# Altium PCB final pedal.PcbDoc
Units mm, origin at the board's own origin, x right, y up, seen from the top; angles counter-clockwise.
Board outline 76.9 x 78.8 mm, 2 copper layers (Top Layer, Bottom Layer); 52 components, 46 nets, 163 pads, 0 vias.
Unrouted connection lines stored in the file: 2.
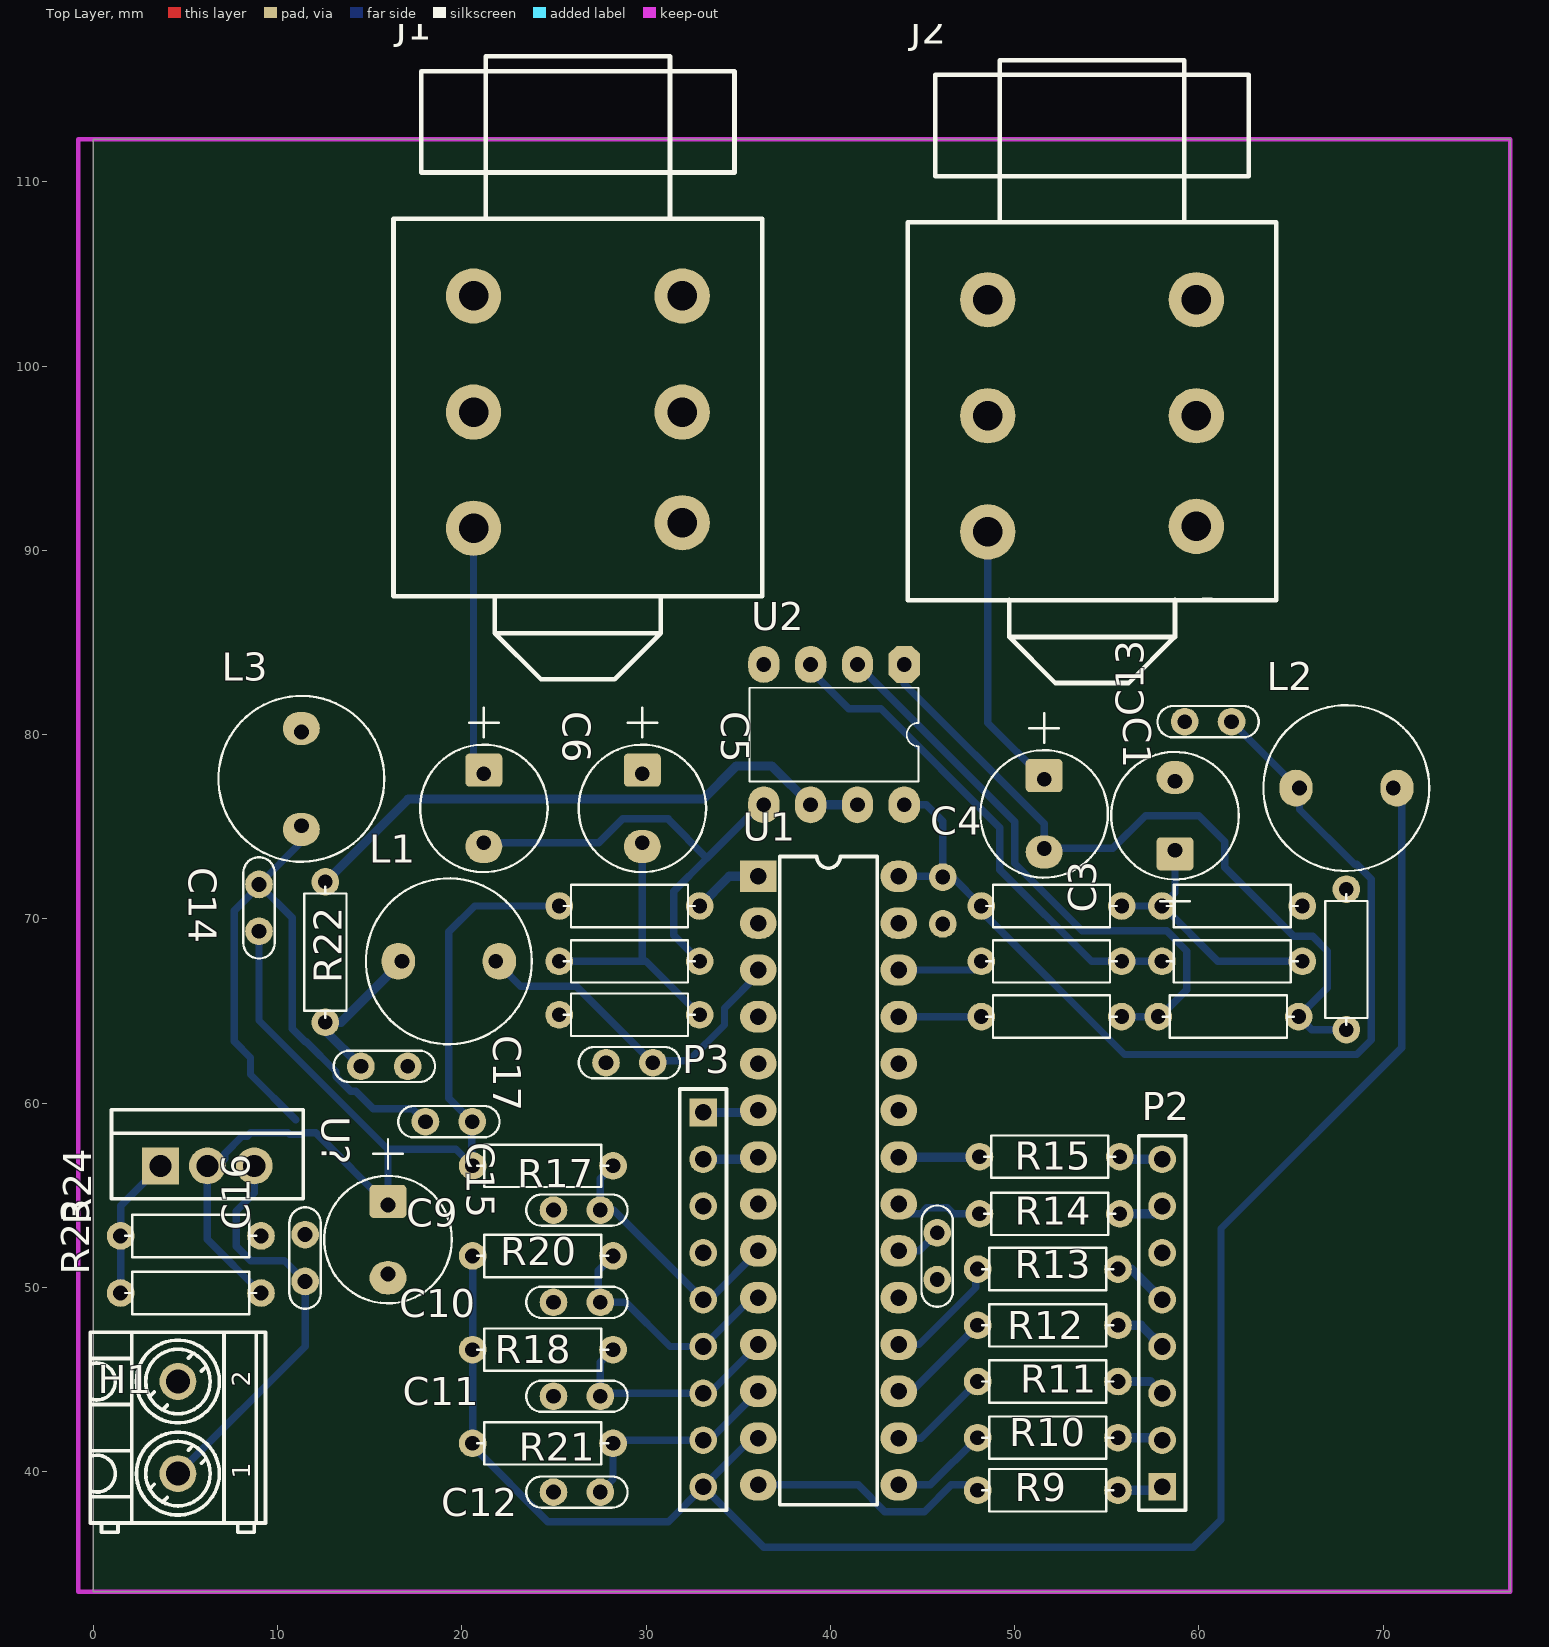
[diagram p0: Top Layer view]
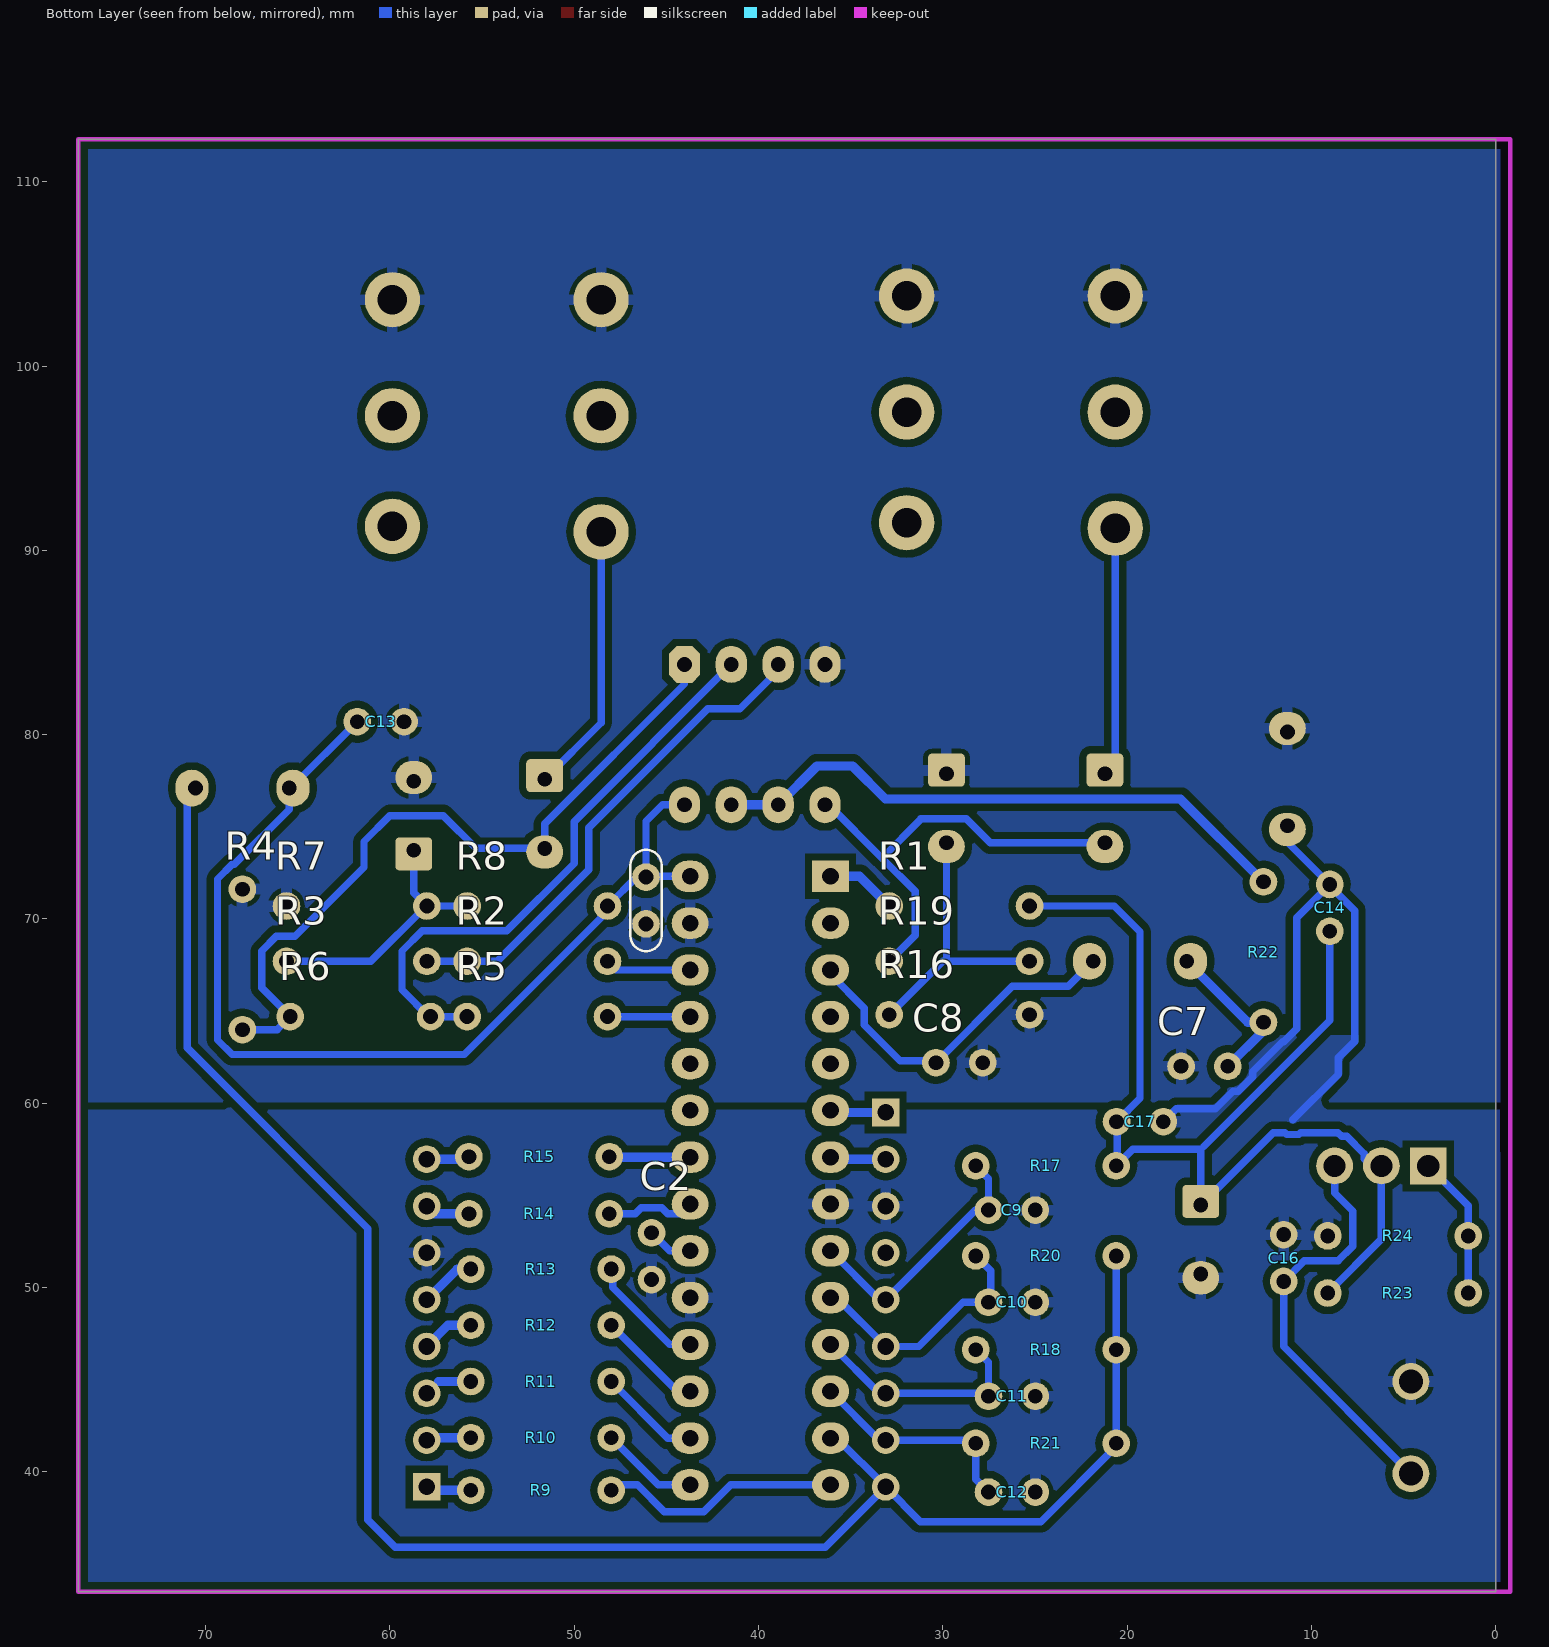
[diagram p1: Bottom Layer view, seen from below]
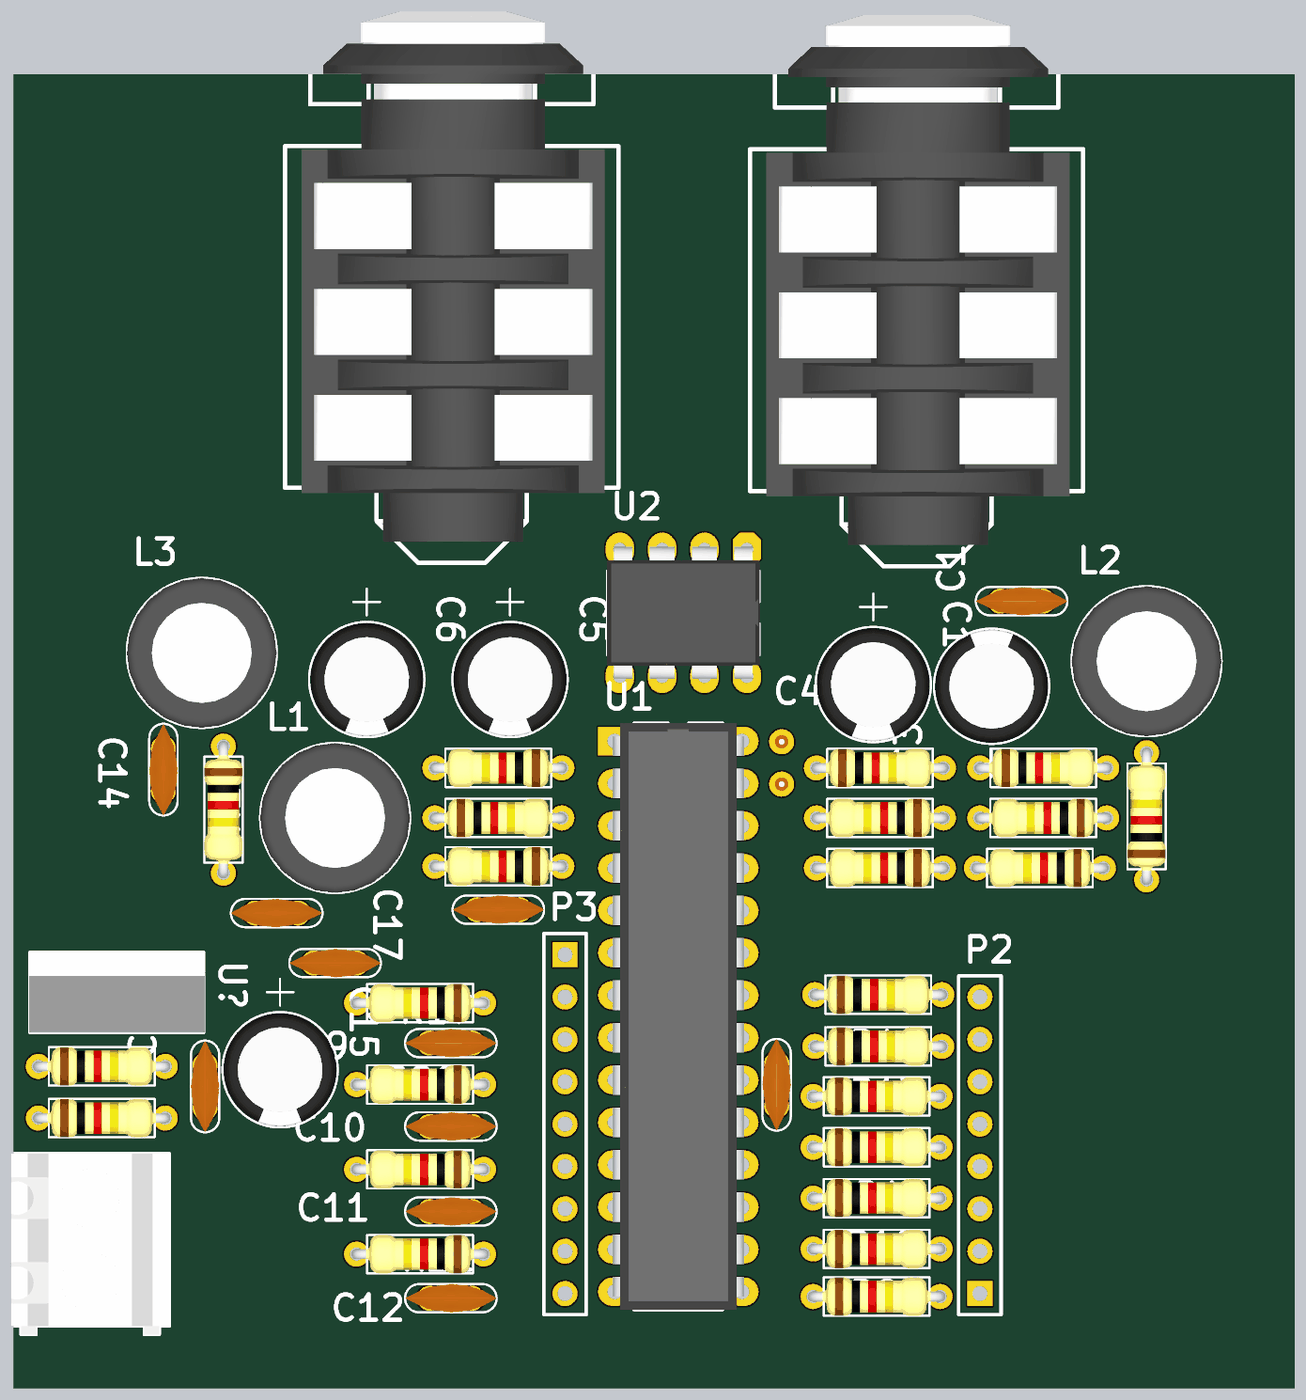
[diagram p2: 3D render of the assembled board from above, using the file's embedded part models]
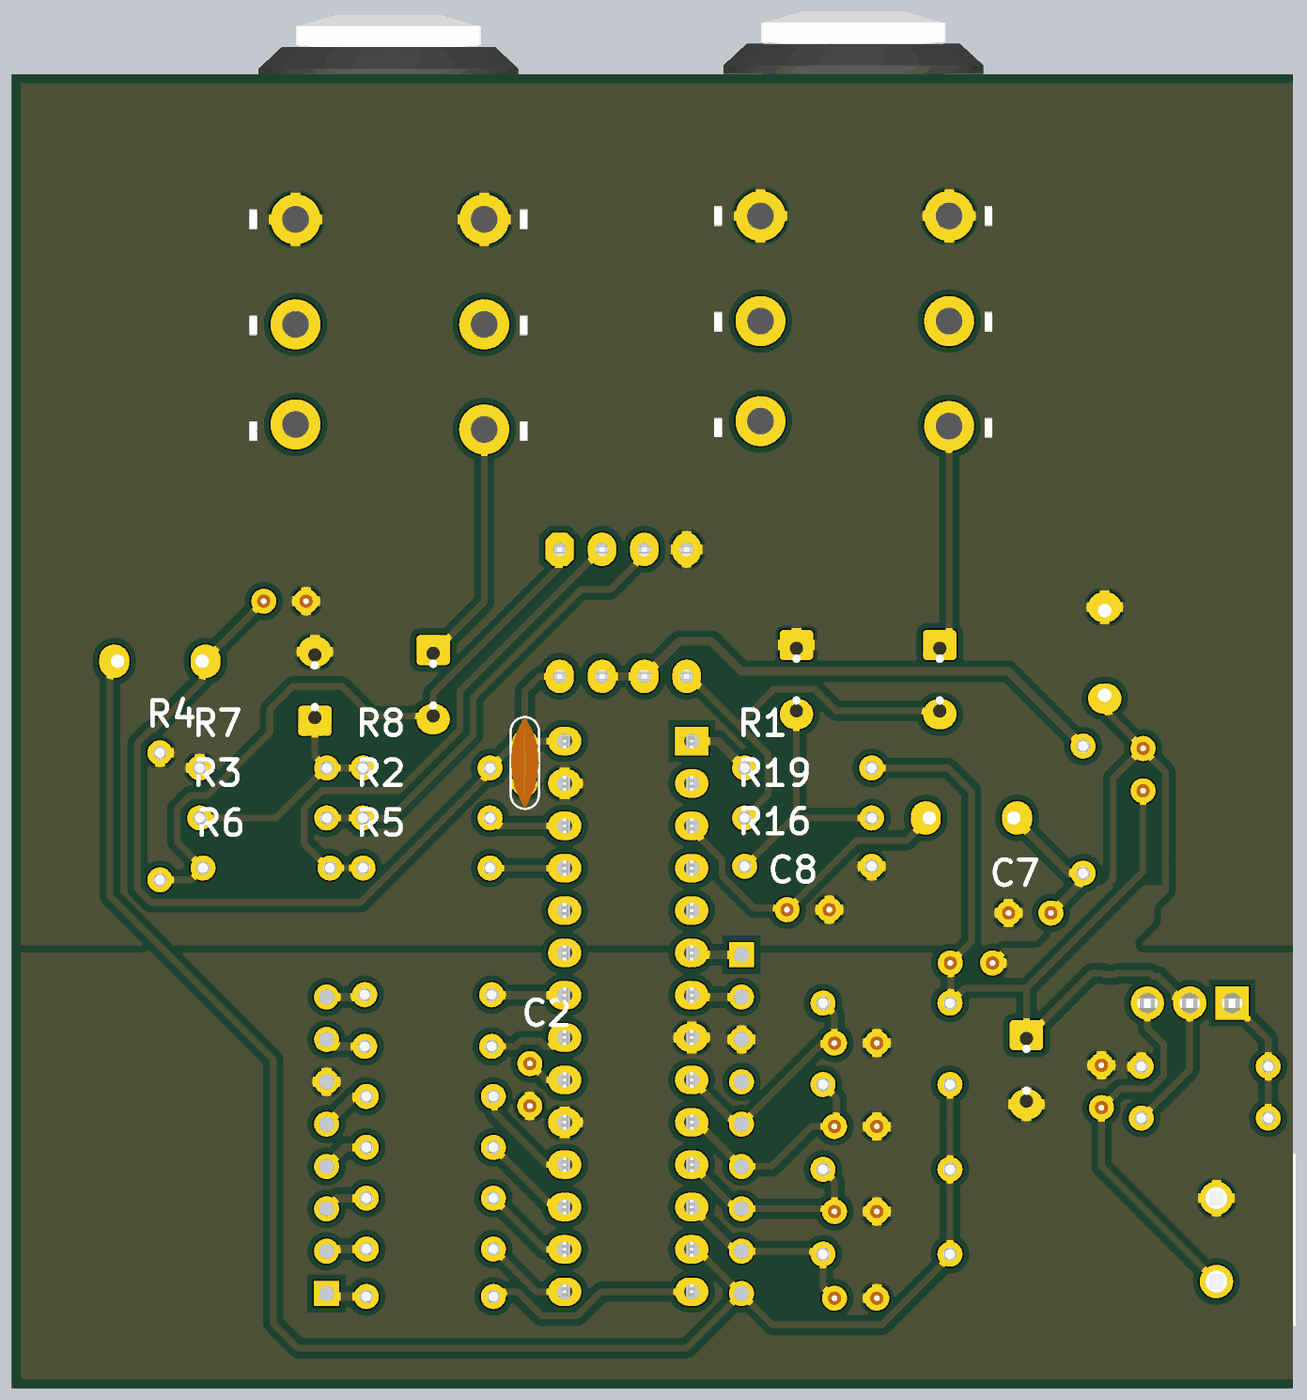
[diagram p3: 3D render of the assembled board from below, using the file's embedded part models]

## Layer stack, top to bottom
Top Solder: solder mask 0.0102, Solder Resist, Dk 3.5
Top Layer: signal copper 0.0356
Dielectric 1: dielectric 0.32, FR-4, Dk 4.8
Bottom Layer: signal copper 0.0356
Bottom Solder: solder mask 0.0102, Solder Resist, Dk 3.5

## Board outline
0,33.5 0,112.3 76.9,112.3 76.9,33.5

## Design rules (kind name [scope] priority, off if disabled: settings)
Clearance [All] p1: gap=0.4
PlaneClearance [All] p1: clearance=0.3
PlaneConnect [All] p1: planeconnectstyle=Direct reliefexpansion=0.508 reliefentries=4 reliefconductorwidth=0.254 reliefairgap=0.254
PolygonConnect [All] p1: connectstyle=Relief reliefconductorwidth=0.6 reliefentries=4 polygonreliefangle="90 Angle" airgapwidth=0.254
RoutingVias [All] p1: holewidth=0.711 width=1.27 viastyle="Through Hole" minholewidth=0.711 minwidth=1.27 maxholewidth=0.711 maxwidth=1.27
SolderMaskExpansion [All] p1: expansion=0.102
Width [All] p1: maxlimit=1 minlimit=0.4 preferedwidth=0.4
28 further rules are at their usual default settings.

## Components (designator, comment, footprint, x,y, rotation, side; value= is the part's Value field where it differs from the comment)
C1 "10µ" CAPAE250P680X1220_VERT 51.6,75.7 r270 top
C2 "100n" Cap-Disk-D5.5-R2.54 45.8,51.7 r270 bottom
C3 "10µ" CAPAE250P680X1220_VERT 58.7,75.6 r90 top
C4 "100n" Cap-Disk-D5.5-R2.54 46.1,71 r270 top
C5 "10µ" CAPAE250P680X1220_VERT 29.8,76 r270 top
C6 "10µ" CAPAE250P680X1220_VERT 21.2,76 r270 top
C7 "100n" Cap-Disk-D5.5-R2.54 15.8,62 r0 bottom
C8 "100n" Cap-Disk-D5.5-R2.54 29.1,62.2 r180 bottom
C9 "100n" Cap-Disk-D5.5-R2.54 26.248,54.2 r180 bottom
C10 "100n" Cap-Disk-D5.5-R2.54 26.248,49.2 r180 bottom
C11 "100n" Cap-Disk-D5.5-R2.54 26.248,44.1 r180 bottom
C12 "100n" Cap-Disk-D5.5-R2.54 26.248,38.9 r180 bottom
C13 "100n" Cap-Disk-D5.5-R2.54 60.5,80.7 r180 bottom
C14 "100n" Cap-Disk-D5.5-R2.54 9,70.6 r90 bottom
C15 "10µ" CAPAE250P680X1220_VERT 16,52.6 r270 top
C16 "100n" Cap-Disk-D5.5-R2.54 11.5,51.6 r90 bottom
C17 "100n" Cap-Disk-D5.5-R2.54 19.3,59 r180 bottom
H1 "BATTERY" WIELAND_25.161.0253.0 4.6,42.4 r90 top
J1 "Phone-Jack 6.3mm Stereo SW" "PHONE-JACK STEREO SW 6.3MM" 18.1,91.2 r0 top
J2 "Phone-Jack 6.3mm Stereo SW" "PHONE-JACK STEREO SW 6.3MM" 46,91 r0 top
L1 "INDC_180u_Toroid" Dr-CW8A 19.3,67.7 r0 top
L2 "INDC_180u_Toroid" Dr-CW8A 68,77.1 r0 top
L3 "INDC_180u_Toroid" Dr-CW8A 11.3,77.6 r270 top
P2 "Header 8" HDR1X8 58,39.18 r90 top
P3 "Header 9" HDR1X9 33.1,59.5 r270 top
R1 "Thick Film" R0.25-300 29.1,70.7 r0 bottom
R2 "Thick Film" R0.25-300 52,67.7 r0 bottom
R3 "Thick Film" R0.25-300 61.8,67.7 r0 bottom
R4 "Thick Film" R0.25-300 68,67.8 r270 bottom
R5 "Thick Film" R0.25-300 52,64.7 r0 bottom
R6 "Thick Film" R0.25-300 61.6,64.7 r0 bottom
R7 "Thick Film" R0.25-300 61.8,70.7 r180 bottom
R8 "Thick Film" R0.25-300 52,70.7 r180 bottom
R9 "Thick Film" R0.25-300 51.8,39 r180 bottom
R10 "Thick Film" R0.25-300 51.8,41.85 r180 bottom
R11 "Thick Film" R0.25-300 51.8,44.9 r180 bottom
R12 "Thick Film" R0.25-300 51.8,47.95 r180 bottom
R13 "Thick Film" R0.25-300 51.8,51 r180 bottom
R14 "Thick Film" R0.25-300 51.9,54 r180 bottom
R15 "Thick Film" R0.25-300 51.9,57.1 r180 bottom
R16 "Thick Film" R0.25-300 29.1,64.8 r0 bottom
R17 "Thick Film" R0.25-300 24.4,56.6 r0 bottom
R18 "Thick Film" R0.25-300 24.4,46.629 r0 bottom
R19 "Thick Film" R0.25-300 29.1,67.7 r180 bottom
R20 "Thick Film" R0.25-300 24.4,51.714 r0 bottom
R21 "Thick Film" R0.25-300 24.4,41.543 r0 bottom
R22 "Thick Film" R0.25-300 12.6,68.2 r90 bottom
R23 "Thick Film" R0.25-300 5.3,49.7 r180 bottom
R24 "Thick Film" R0.25-300 5.3,52.8 r180 bottom
U1 "DSPIC33FJ128GP802-I/SP" DIP28-300 39.9,55.8 r0 top
U2 "OPA2350" DIL8-300A 40.2,80 r180 top
U? "LM317KC" TO-220-v 6.2,56.6 r0 top

## Footprints (in the part's own frame and the unit in brackets; to place one, negate y for a bottom-side part, rotate by r counter-clockwise, add the part's x,y. Pads: shape width x height; smd on the part's side, far side on the other; paste and mask are expansions set on the pad)
Cap-Disk-D5.5-R2.54 [mm]
  round 1.5 hole 0.8: 1(1.27,0) 2(-1.27,0)
  body extent -2.75,-0.86 2.75,0.86, height 6.25
CAPAE250P680X1220_VERT [mm]
  round 0.508 on Mech15: 0(0,0)
  rrect25% 1.8x2 hole 0.8 copper offset -0.2,0: 1(-1.873,0)
  oval 1.8x2 hole 0.8 copper offset 0.2,0: 2(1.873,0)
  silkscreen extent -5.45,-3.46 3.46,3.46, body extent -3.37,-3.37 3.37,3.37, height 12.2
DIL8-300A [mm]
  oct 1.7x2 hole 0.8: 1(-3.81,-3.81)
  oval 1.7x2 hole 0.8: 2(-1.27,-3.81) 3(1.27,-3.81) 4(3.81,-3.81) 5(3.81,3.81) 6(1.27,3.81) 7(-1.27,3.81) 8(-3.81,3.81)
  silkscreen extent -4.58,-2.54 4.58,2.54, body extent -4.58,-3.96 4.58,3.96, height 3.88
DIP28-300 [mm] "DIP 28 Leads, Row Spacing 7.62mm; Pitch 2.54mm"
  rect 2x1.7 hole 0.9: 1(-3.81,16.51)
  oval 2x1.7 hole 0.9: 2(-3.81,13.97) 3(-3.81,11.43) 4(-3.81,8.89) 5(-3.81,6.35) 6(-3.81,3.81) 7(-3.81,1.27) 8(-3.81,-1.27) 9(-3.81,-3.81) 10(-3.81,-6.35) 11(-3.81,-8.89) 12(-3.81,-11.43) 13(-3.81,-13.97) 14(-3.81,-16.51) 15(3.81,-16.51) 16(3.81,-13.97) 17(3.81,-11.43) 18(3.81,-8.89) 19(3.81,-6.35) 20(3.81,-3.81) 21(3.81,-1.27) 22(3.81,1.27) 23(3.81,3.81) 24(3.81,6.35) 25(3.81,8.89) 26(3.81,11.43) 27(3.81,13.97) 28(3.81,16.51)
  silkscreen extent -2.65,-17.59 2.65,17.59, body extent -3.93,-17.59 3.94,17.59, height 4.57
Dr-CW8A [mm]
  oval 1.8x2 hole 0.8 copper offset -0.2,0: 1(-2.54,0)
  oval 1.8x2 hole 0.8 copper offset 0.2,0: 2(2.54,0)
  silkscreen extent -4.5,-4.5 4.5,4.5, body extent -4.5,-4.5 4.5,4.5, height 13.27
HDR1X8 [mm] "Connector; Header; 8 Position"
  rect 1.5x1.5 hole 0.9: 1(0,0)
  round 1.5 hole 0.9: 2(2.54,0) 3(5.08,0) 4(7.62,0) 5(10.16,0) 6(12.7,0) 7(15.24,0) 8(17.78,0)
  silkscreen extent -1.27,-1.27 19.05,1.27
HDR1X9 [mm] "Connector; Header; 9 Position"
  rect 1.5x1.5 hole 0.9: 1(0,0)
  round 1.5 hole 0.9: 2(2.54,0) 3(5.08,0) 4(7.62,0) 5(10.16,0) 6(12.7,0) 7(15.24,0) 8(17.78,0) 9(20.32,0)
  silkscreen extent -1.27,-1.27 21.59,1.27
"PHONE-JACK STEREO SW 6.3MM" [mm] "SJ-6306"
  round 3 hole 1.6: 1(2.54,0) 2(2.54,6.3) 3(2.54,12.6) 4(13.86,12.6) 5(13.86,6.3) 6(13.86,0.3)
  silkscreen extent -1.8,-8.2 18.2,25.6, body extent -0.81,-6.93 17.39,24.86, height 16
R0.25-300 [mm]
  round 1.5 hole 0.8: 1(3.81,0) 2(-3.81,0)
  body extent -4.11,-1.15 4.11,1.15, height 2.3
TO-220-v [mm] "TO-220 3-Terminal - Vertical Mount"
  rect 2x2 hole 1.2: 1(-2.54,0)
  round 2 hole 1.2: 2(0,0) 3(2.54,0)
  silkscreen extent -5.21,-1.78 5.21,3.05, body extent -5.27,-1.75 5.27,2.95, height 20.5
WIELAND_25.161.0253.0 [mm] "Terminal Block, Pitch 5mm, 2 Positions, Screw Connection"
  round 2 hole 1.3: 1(-2.5,0) 2(2.5,0)
  silkscreen extent -5.68,-4.75 5.18,4.75, body extent -5.67,-4.75 5.18,4.75, height 15

## Part data
C1 C3 C5 C6 C15: library part CAPT_330u_2917_6V3, "Capacitor SMD Tant 330uF 20% 6V3 2917"
C2 C4 C7 C8 C9 C10 C11 C12 C13 C14 C16 C17: library part CAPC_100n_1206_NP0_50V_5%, "Capacitor SMD Cer 100nF 1206 NP0 50V 5%"
H1: library part Header2P, "Header, 2-pin"
L1 L2 L3: "Power Inductor 180µH 10% SMD Toroid"
P2: "Header, 8-Pin"
P3: "Header, 9-Pin"
R1 R2 R3 R4 R5 R6 R7 R8 R9 R10 R11 R12 R13 R14 R15 R16 R17 R18 R19 R20 R21 R22 R23 R24: library part RES_1M_0805_5%, "Resistor SMD chip 1M Ohm 0.125W 5% 0805"
U1: "High-Performance 16-bit Digital Signal Controller, 128 KB Flash, 16 KB RAM, 28-Pin SPDIP, Industrial Temperature"
U2: library part OPA2313ID, "1-MHz, Micropower, Low-Noise, Rail-to-Rail I/O Operational Amplifier, 1.8 to 5.5 V, -40 to 125 degC, 8-pin SOIC (D8), Green (RoHS & no Sb/Br)"
U?: "3-Terminal Adjustable Regulator"

## Nets (pads, with @x,y where several pads share a name; then routed paths per layer and width w, separated by ;. In a path a pad name is that pad's centre, name@x,y a point inside that pad or via, vN(x,y) a via of type N, cw(c..) or ccw(c..) an arc to the next point about the centre after c; other vN are vias at no path point)
AGND: C3.2 C4.1 C5.1 C7.1 C8.1 C13.1 J1.3 J1.4 J2.3 J2.4 L3.1 R4.2 R7.2 R16.2 U1.27 U2.4 | length 0.1
  Bottom Layer w0.4: U2.4@36.337,83.81 U2.4
"AUDIO IN RIGHT": C6.1 J1.1 | length 13.6
  Bottom Layer w0.4: J1.1 20.64,78.433 C6.1
BUT1: C9.2 P3.5 R17.1 U1.9 | length 14.4
  Bottom Layer w0.4: R17.1 27.518,55.908 C9.2 28.24,54.2 P3.5 33.44,49.34 U1.9
BUT2: C10.2 P3.6 R20.1 U1.10 | length 13.6
  Bottom Layer w0.4: R20.1 27.4,50.904 27.4,49.318 C10.2 28.9,49.2 31.3,46.8 P3.6 35.75,49.45 U1.10
BUT3: C11.2 P3.7 R18.1 U1.11 | length 12.6
  Bottom Layer w0.4: R18.1 27.518,45.937 C11.2 27.678,44.26 P3.7 33.44,44.26 U1.11
BUT4: C12.2 P3.8 R21.1 U1.12 | length 12
  Bottom Layer w0.4: C12.2 28.21,39.592 R21.1 28.387,41.72 P3.8 33.44,41.72 U1.12
D1: R9.1 U1.14 | length 13.2
  Bottom Layer w0.4: U1.14 41.509,39.29 42.959,37.84 45.111,37.84 46.561,39.29 47.7,39.29 R9.1
D2: R10.1 U1.15 | length 5.3
  Bottom Layer w0.4: U1.15 45.43,39.29 R10.1
D3: R11.1 U1.16 | length 5.6
  Bottom Layer w0.4: U1.16 44.92,41.83 R11.1
D4: R12.1 U1.17 | length 5.8
  Bottom Layer w0.4: U1.17 44.41,44.37 R12.1
D5: R13.1 U1.18 | length 6.5
  Bottom Layer w0.4: U1.18 44.81,46.91 47.9,50 47.9,50.91 R13.1
D6: R14.1 U1.21 | length 4.9
  Bottom Layer w0.4: U1.21 44.24,54 44.921,54 45.241,54.32 46.359,54.32 46.679,54 R14.1
D7: R15.1 U1.22 | length 4.4
  Bottom Layer w0.5: U1.22 48.06,57.07 R15.1
DAC1A: U1.23
DAC1B: U1.24
DAC2A: R5.2 U1.25 | length 4.5
  Bottom Layer w0.4: U1.25 48.18,64.69 R5.2
DAC2B: R2.2 U1.26 | length 4.7
  Bottom Layer w0.4: U1.26 47.72,67.23 R2.2
GND: C2.1 C9.1 C10.1 C11.1 C12.1 C14.1 C15.2 C16.1 C17.1 H1.2 L3.2 P2.6 P3.3 R24.2 U1.8 U1.19 | length 37.8
  Bottom Layer w0.4: 11,59.1 8.54,61.56 8.54,62.468 7.65,63.358 7.65,70.45 9.3,72.1 9,72.1 C14.1 ; L3.2 11.3,74.17 C14.1 ; C17.1 17.33,59.7 15.2,59.7 14.25,60.65 13.971,60.65 13.18,61.441 13.18,61.72 11.569,63.331 11.5,63.331 10.8,64.031 10.8,70.07 C14.1
"LEFT BUFFER": U1.2
MCLR: R1.1 U1.1 | length 3.8
  Bottom Layer w0.5: R1.1 34.52,72.31 U1.1
NetC1_2: C1.2 R4.1 R6.1 U2.1 | length 40.2
  Bottom Layer w0.4: U2.1 44.01,82.746 51.6,75.156 C1.2 55.327,73.827 57.1,75.6 60,75.6 61.4,74.2 61.4,72.8 65.15,69.05 66.169,69.05 66.96,68.26 66.96,66.26 65.41,64.71 R6.1 66.12,63.99 R4.1
NetC2_2: C2.2 U1.20 | length 2.5
  Bottom Layer w0.4: U1.20 44.82,51.99 C2.2
NetC3_1: C3.1 R3.1 R7.1 R8.2 | length 14.7
  Bottom Layer w0.4: R8.2 R7.1 ; C3.1@58.7,74.027 58.7,71.41 R7.1 ; R3.1 61.031,67.7 58.031,70.7 R7.1
NetC5_2: C5.2 R16.1 R19.1 | length 19.2
  Bottom Layer w0.4: C5.2@29.8,73.527 29.8,67.7 R19.1 30,67.7 32.9,64.8 R16.1
NetC6_2: C6.2 R19.2 U2.5 | length 24.7
  Bottom Layer w0.4: C6.2 27.427,74.127 28.727,75.427 31.2,75.427 31.2,75.4 33.3,73.3 36.19,76.19 U2.5 ; R19.2 31.5,69.11 31.5,71.5 33.25,73.25
NetC7_2: C7.2 L1.1 R22.2 | length 8.7
  Bottom Layer w0.5: C7.2 12.6,63.93 R22.2 13.45,64.39 L1.1
NetP2_1: P2.1 R9.2 | length 2.2
  Bottom Layer w0.5: R9.2 P2.1@57.82,39
NetP2_2: P2.2 R10.2 | length 2.3
  Bottom Layer w0.5: R10.2 P2.2@57.87,41.85
NetP2_3: P2.3 R11.2 | length 1.8
  Bottom Layer w0.5: R11.2 57.36,44.9
NetP2_4: P2.4 R12.2 | length 2.9
  Bottom Layer w0.5: R12.2 56.85,47.95 P2.4
NetP2_5: P2.5 R13.2 | length 3.1
  Bottom Layer w0.5: R13.2 56.34,51 P2.5
NetP2_7: P2.7 R14.2 | length 1.9
  Bottom Layer w0.5: R14.2 P2.7@57.58,54
NetP2_8: P2.8 R15.2 | length 2.2
  Bottom Layer w0.5: R15.2@55.85,56.96 P2.8
NetR2_1: R2.1 R3.2 U2.3 | length 27.5
  Bottom Layer w0.4: U2.3 39.4,83.81 39.4,83 41,81.4 42.749,81.4 49.2,74.949 49.2,72.674 54.174,67.7 R2.1 R3.2
NetR5_1: R5.1 R6.2 U2.2 | length 31.9
  Bottom Layer w0.4: U2.2 50,75.28 50,73.006 53.656,69.35 58.25,69.35 59.34,68.26 59.34,66.16 57.88,64.7 R6.2 R5.1
NetR22_1: R22.1 U2.6 U2.7 | length 32.4
  Bottom Layer w0.5: R22.1 12.6,72.1 12.7,72.1 17.1,76.5 33.1,76.5 34.9,78.3 36.82,78.3 U2.6 U2.7
NetR23_1: R23.1 R24.1 U?.1 | length 7.8
  Bottom Layer w0.4: R23.1 R24.1 1.49,54.43 U?.1
OUT1: C1.1 J2.1 | length 14.7
  Bottom Layer w0.4: J2.1 48.54,80.633 C1.1
PGEC: U1.5
PGED: U1.4
"RIGHT BUFFER": C8.2 L1.2 U1.3 | length 19.5
  Bottom Layer w0.4: L1.2 23.19,66.35 26.22,66.35 C8.2 30.47,62.3 32.319,62.3 34.26,64.241 34.26,65.16 36.09,66.99 U1.3 U1.3@36.09,67.03
RX: P3.1 U1.6 | length 2.9
  Bottom Layer w0.5: P3.1 U1.6@35.98,59.5
TX: P3.2 U1.7 | length 2.9
  Bottom Layer w0.5: P3.2 U1.7@35.98,56.96
VCC: C16.2 H1.1 P3.4 U?.3 | length 22.6
  Bottom Layer w0.4: H1.1 11.5,46.8 C16.2 10.38,51.45 8.551,51.45 7.76,52.241 7.76,54.15 8.74,55.13 U?.3
"VCC ANA": C4.2 C13.2 L2.1 R8.1 U1.28 U2.8 | length 56.2
  Bottom Layer w0.4: U1.28 C4.2@46.1,72.31 ; U2.8 45.21,76.19 46.1,75.3 C4.2@46.1,72.31 ; C4.2 C4.2@46.1,72.31 ; C13.2 65.37,77.1 L2.1 65.46,75.94 68.44,72.96 68.559,72.96 69.35,72.169 69.35,63.431 68.559,62.64 55.961,62.64 48.19,70.411 R8.1 46.58,72.31 C4.2@46.1,72.31
"VCC DIGI": C14.2 C15.1 C17.2 L2.2 P3.9 R1.2 R17.2 R18.2 R20.2 R21.2 R23.2 U1.13 U?.2 | length 166.3
  Bottom Layer w0.4: C14.2 9,64.489 15.839,57.65 ; R23.2 6.2,52.61 U?.2 6.76,56.6 7.14,56.98 7.14,57.263 8.077,58.2 8.36,58.2 8.56,58.4 10.569,58.4 10.669,58.3 11.331,58.3 11.431,58.4 12.073,58.4 C15.1 16,57.489 15.989,57.5 19.69,57.5 R17.2@20.54,56.65 ; C17.2 C17.2@20.54,59.03 ; R20.2 R18.2 R21.2 20.59,41.379 24.669,37.3 31.22,37.3 P3.9 ; R17.2 R17.2@20.54,56.65 ; R1.2@25.29,70.66 R1.2 20.7,70.7 19.3,69.3 19.3,60.27 C17.2@20.54,59.03 ; U1.13 35.75,41.83 P3.9 ; L2.2 71,76.64 71,63 61.2,53.2 61.2,37.4 59.7,35.9 36.38,35.9 P3.9 ; R17.2@20.54,56.65 C17.2@20.54,59.03
pads on no net: C1.0 C3.0 C5.0 C6.0 C15.0 J1.2 J1.5 J1.6 J2.2 J2.5 J2.6

## Polygon pours and split planes (outlines as drawn)
AGND on Bottom Layer "Bottom Layer-No Net" (solid, remove dead copper, pour order 2): -0.301,112.648 76.899,112.648 76.899,60.748 76.999,60.648 76.399,60.048 -0.201,60.048 -0.301,60.048 -0.301,112.548
GND on Bottom Layer "Bottom Layer-No Net" (solid, remove dead copper, pour order 4): -0.2,63.675 76.65,63.675 76.7,63.724 76.7,33.651 -0.419,33.651

## Keep-outs
Keep-Out Layer:
  lines w0.254: -0.8,33.5 76.9,33.5 76.9,112.3 -0.8,112.3 -0.8,33.5

## Text inside footprints (layer, text, board x,y; h text height)
H1: Top Overlay "2" at 8.522,44.619 h1 r90; Top Overlay "1" at 8.522,39.62 h1 r90; Mechanical 14 "1" at 8.522,39.62 h1 r90; Mechanical 14 "2" at 8.522,44.619 h1 r90